# EAGLE board 555Timer (EAGLE 6.6.0)
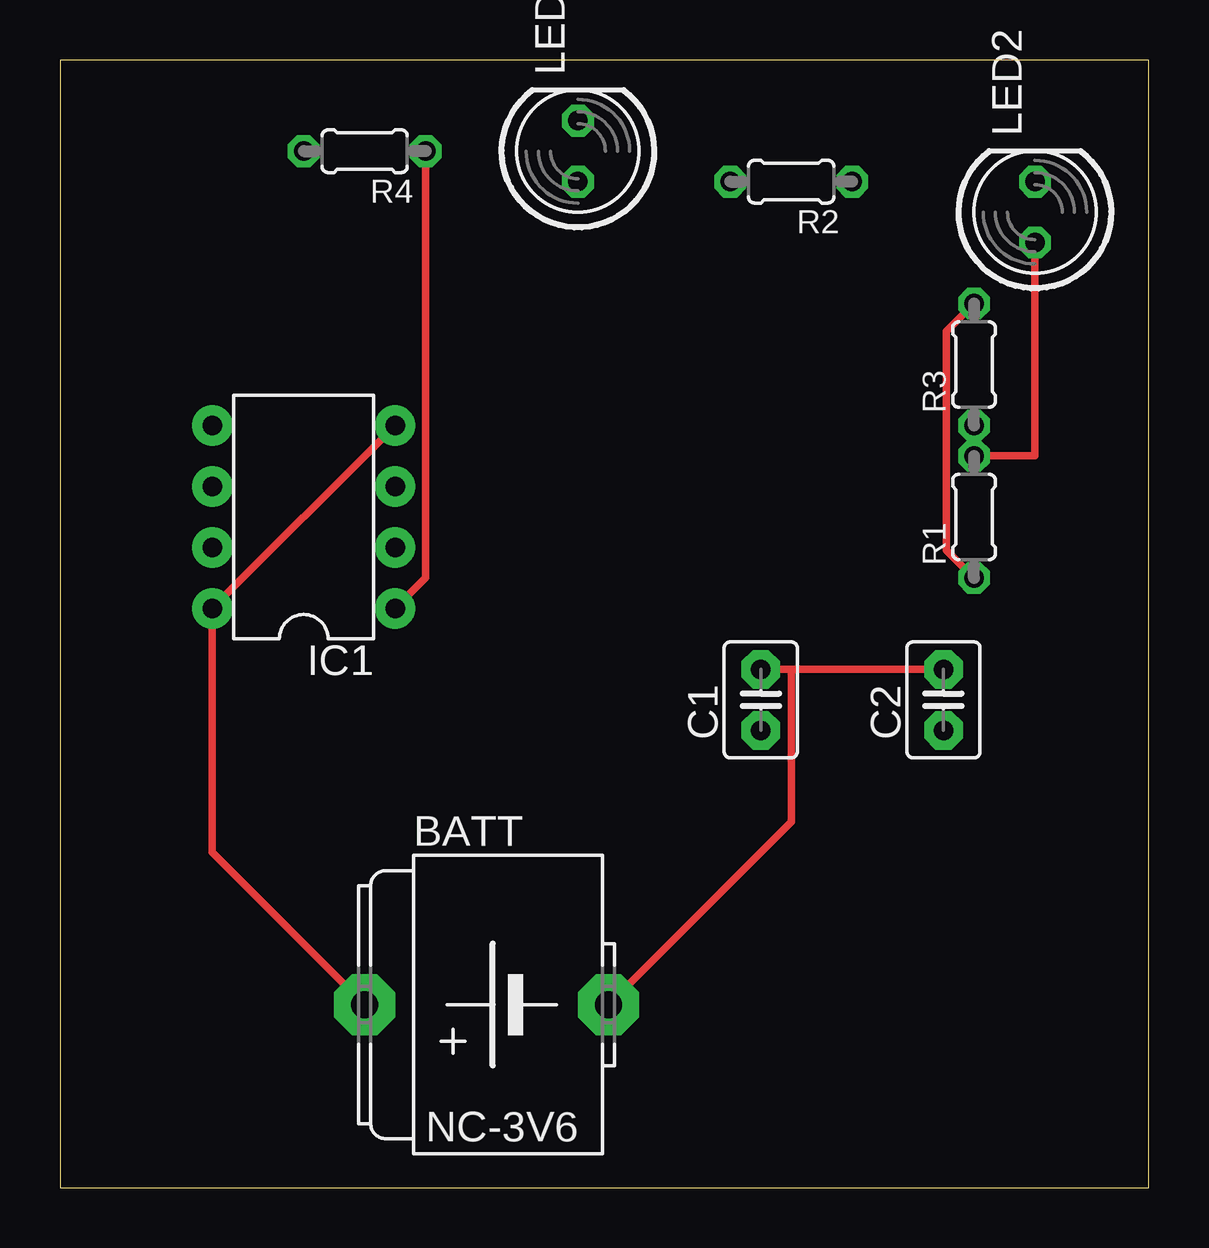
[diagram p0: board, top side]
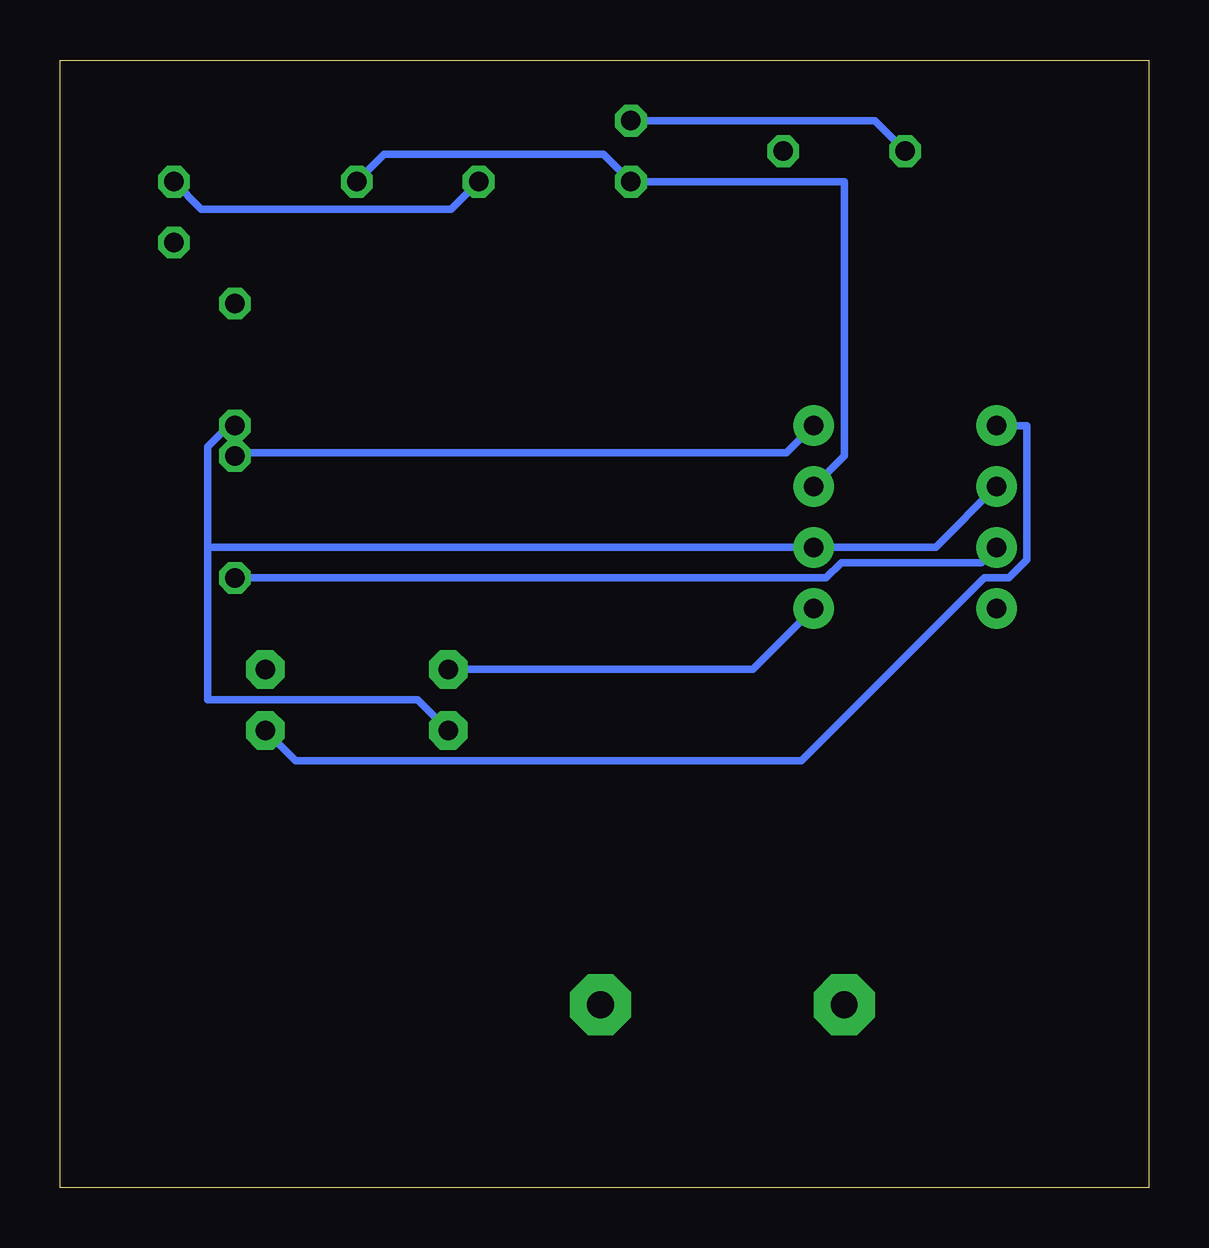
[diagram p1: board, bottom side, seen from below]

Size 45.39 x 46.98 mm. Coordinates in mm from the lower left corner, seen from the top.
Outline: 0,0 45.39,0 45.39,46.98 0,46.98 0,0
Copper layers (1*16): Top 0.035mm / dielectric 1.5mm / Bottom 0.035mm
Design rules "default": minimum track width 10mil, minimum drill 24mil, track to track 8mil, track to pad 8mil, pad to pad 8mil, via to via 8mil, smd to smd 8mil, copper to edge 40mil, drill to drill 8mil, minimum pad ring 10mil, minimum via ring 8mil, stop-mask expansion 4mil, vias tented up to drill 0mil, thermal gap 10mil
Net classes: 0 default: width 0.305 mm, drill 0.508 mm, clearance 0.254 mm

## Footprints (pad centres in the part's own frame; a part is rotated, then mirrored left to right if it is on the bottom)
3V11R = drill 1.118 pad 2.54 octagon: + -5.08,0; - 5.08,0
C2.5-3 = drill 0.813 pad 1.6 octagon: 1 -1.27,0; 2 1.27,0
DIL08-ROUND = drill 0.813 pad 1.676: 1 -3.81,-3.81; 2 -1.27,-3.81; 3 1.27,-3.81; 4 3.81,-3.81; 5 3.81,3.81; 6 1.27,3.81; 7 -1.27,3.81; 8 -3.81,3.81
LED5MM = drill 0.813 octagon: A -1.27,0; K 1.27,0
0204/5 = drill 0.813 octagon: 1 -2.54,0; 2 2.54,0

## Placement (x,y rotation side)
BATT  3V11R  [3V11R]  17.78,7.62 0 top
C1  22 uF  [C2.5-3]  29.21,20.32 90 top
C2  .01 uF  [C2.5-3]  36.83,20.32 90 top
IC1  NE555N  [DIL08-ROUND]  10.16,27.94 90 top
LED1  green  [LED5MM]  21.59,43.18 90 top
LED2  green  [LED5MM]  40.64,40.64 90 top
R1  1K  [0204/5]  38.1,27.94 90 top
R2  100  [0204/5]  30.48,41.91 180 top
R3  100K  [0204/5]  38.1,34.29 90 top
R4  100  [0204/5]  12.7,43.18 180 top

## Library data of the parts
BATT = battery
C1 C2 = capacitor-wima
IC1 = adafruit
LED1 LED2 = led
R1-R4 = resistor

## Nets
CONN: C1.1 IC1.2 IC1.6 R3.1
GND: BATT.- C1.2 C2.2 IC1.1 R4.1
N$1: LED2.K R2.2
N$2: IC1.3 LED1.A R2.1
N$3: LED1.K R4.2
N$4: IC1.7 R1.1 R3.2
N$6: C2.1 IC1.5
VCC: BATT.+ IC1.4 IC1.8 LED2.A R1.2

## Tracks (layer width: path | path; a pad name or v marks a point on that pad's centre or on a via)
CONN
  Bottom 0.305: IC1.6 8.89,26.67 IC1.2 39.24,26.67 | R3.1 38.23,31.62 38.48,31.62 39.24,30.86 39.24,26.67 | 39.24,26.67 39.24,20.32 30.48,20.32 C1.1
GND
  Top 0.305: R4.1 15.24,25.4 IC1.1 | C2.2 30.48,21.59 | 30.48,21.59 C1.2 | BATT.- 30.48,15.24 30.48,21.59
  Bottom 0.305: IC1.1 16.51,21.59 C1.2
N$1
  Bottom 0.305: R2.2 29.08,40.77 39.5,40.77 LED2.K
N$2
  Bottom 0.305: R2.1 31.88,43.05 22.73,43.05 LED1.A 12.7,41.91 12.7,30.48 IC1.3
N$3
  Bottom 0.305: R4.2 11.43,44.45 LED1.K
N$4
  Top 0.305: R1.1 36.96,26.54 36.96,35.69 R3.2
  Bottom 0.305: IC1.7 6.99,26.04 12.83,26.04 13.46,25.4 R1.1
N$6
  Bottom 0.305: C2.1 35.56,17.78 14.48,17.78 6.86,25.4 5.84,25.4 5.08,26.16 5.08,31.75 IC1.5
VCC
  Top 0.305: R1.2 40.64,30.48 LED2.A | IC1.4 IC1.8 6.35,13.97 BATT.+
  Bottom 0.305: R1.2 37.97,30.61 15.11,30.61 IC1.4